# EAGLE board SparkFun_Micro_Bit_Moto_Bit-Panel (EAGLE 9.3.2), part 1 of 3
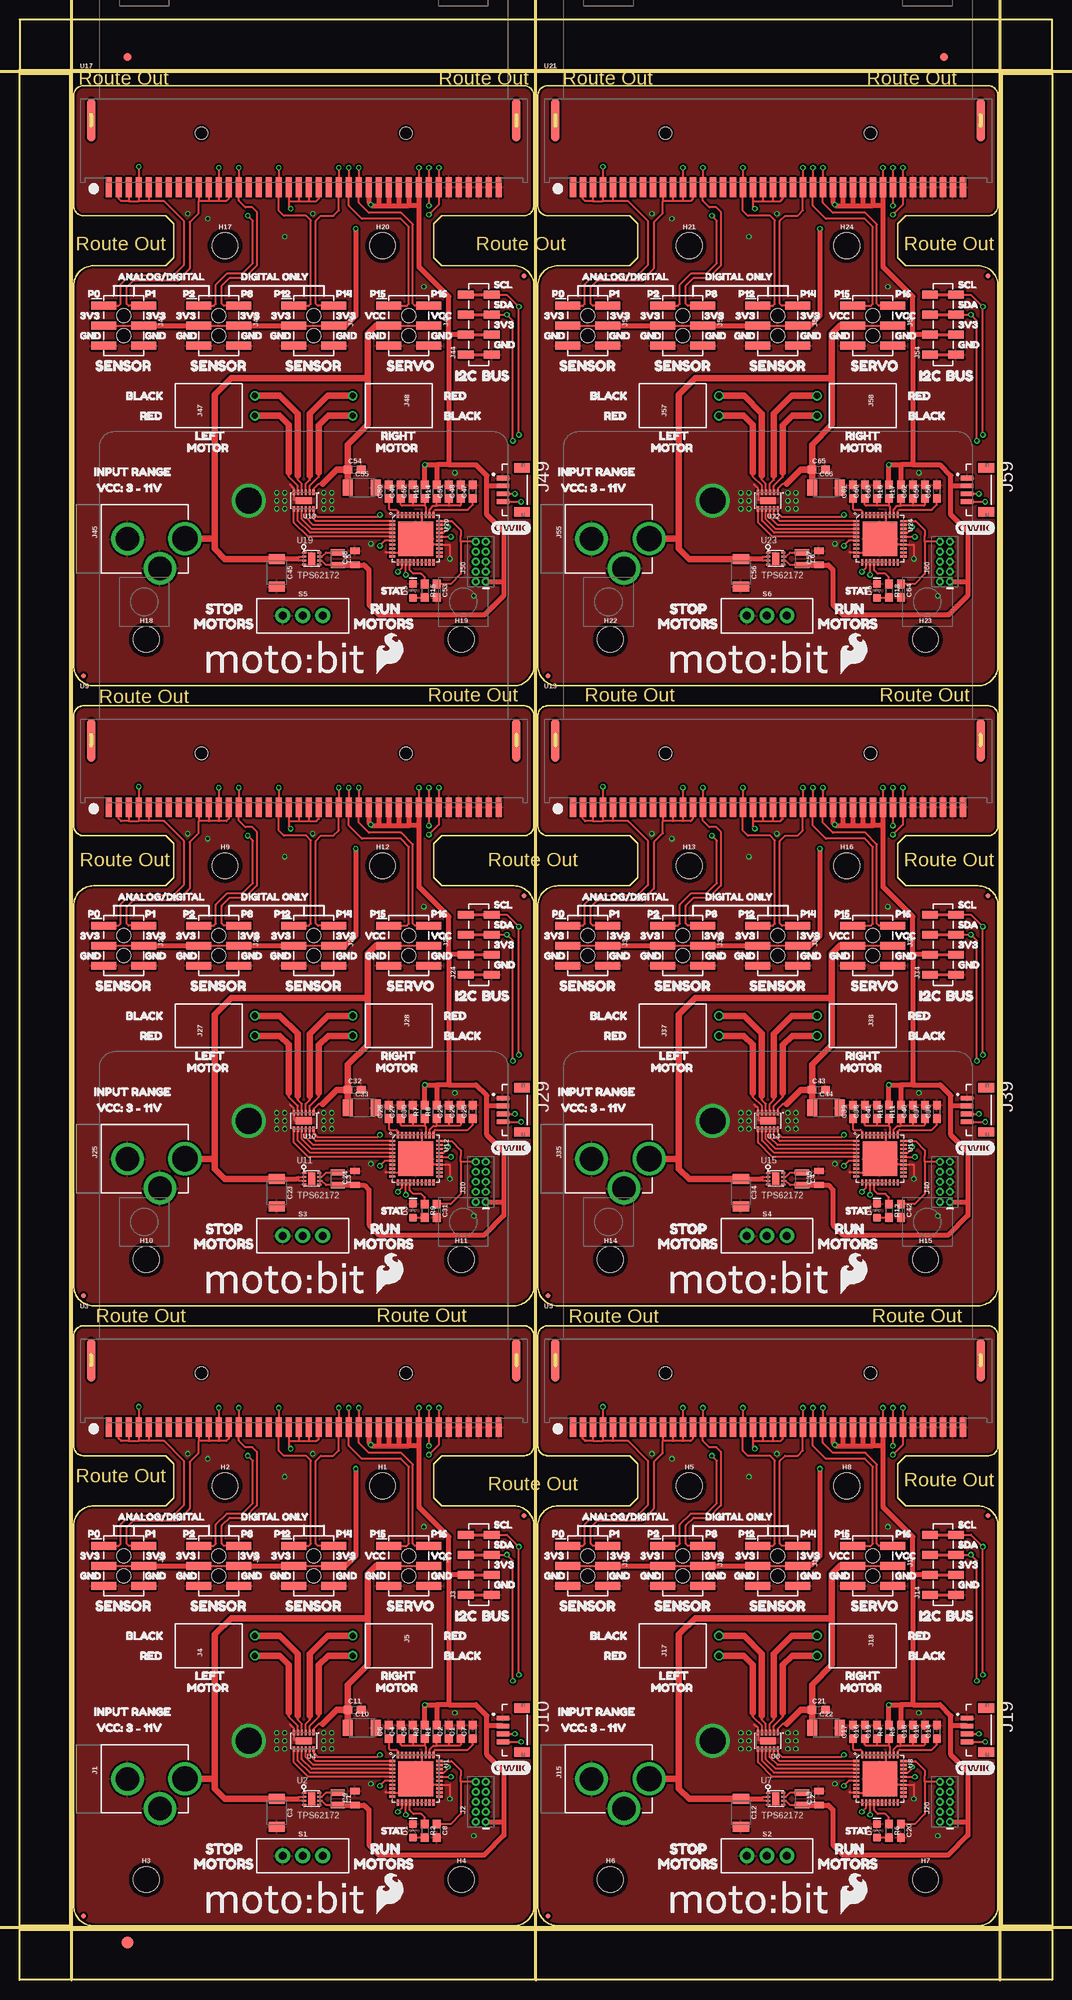
[diagram p0: board, top side]
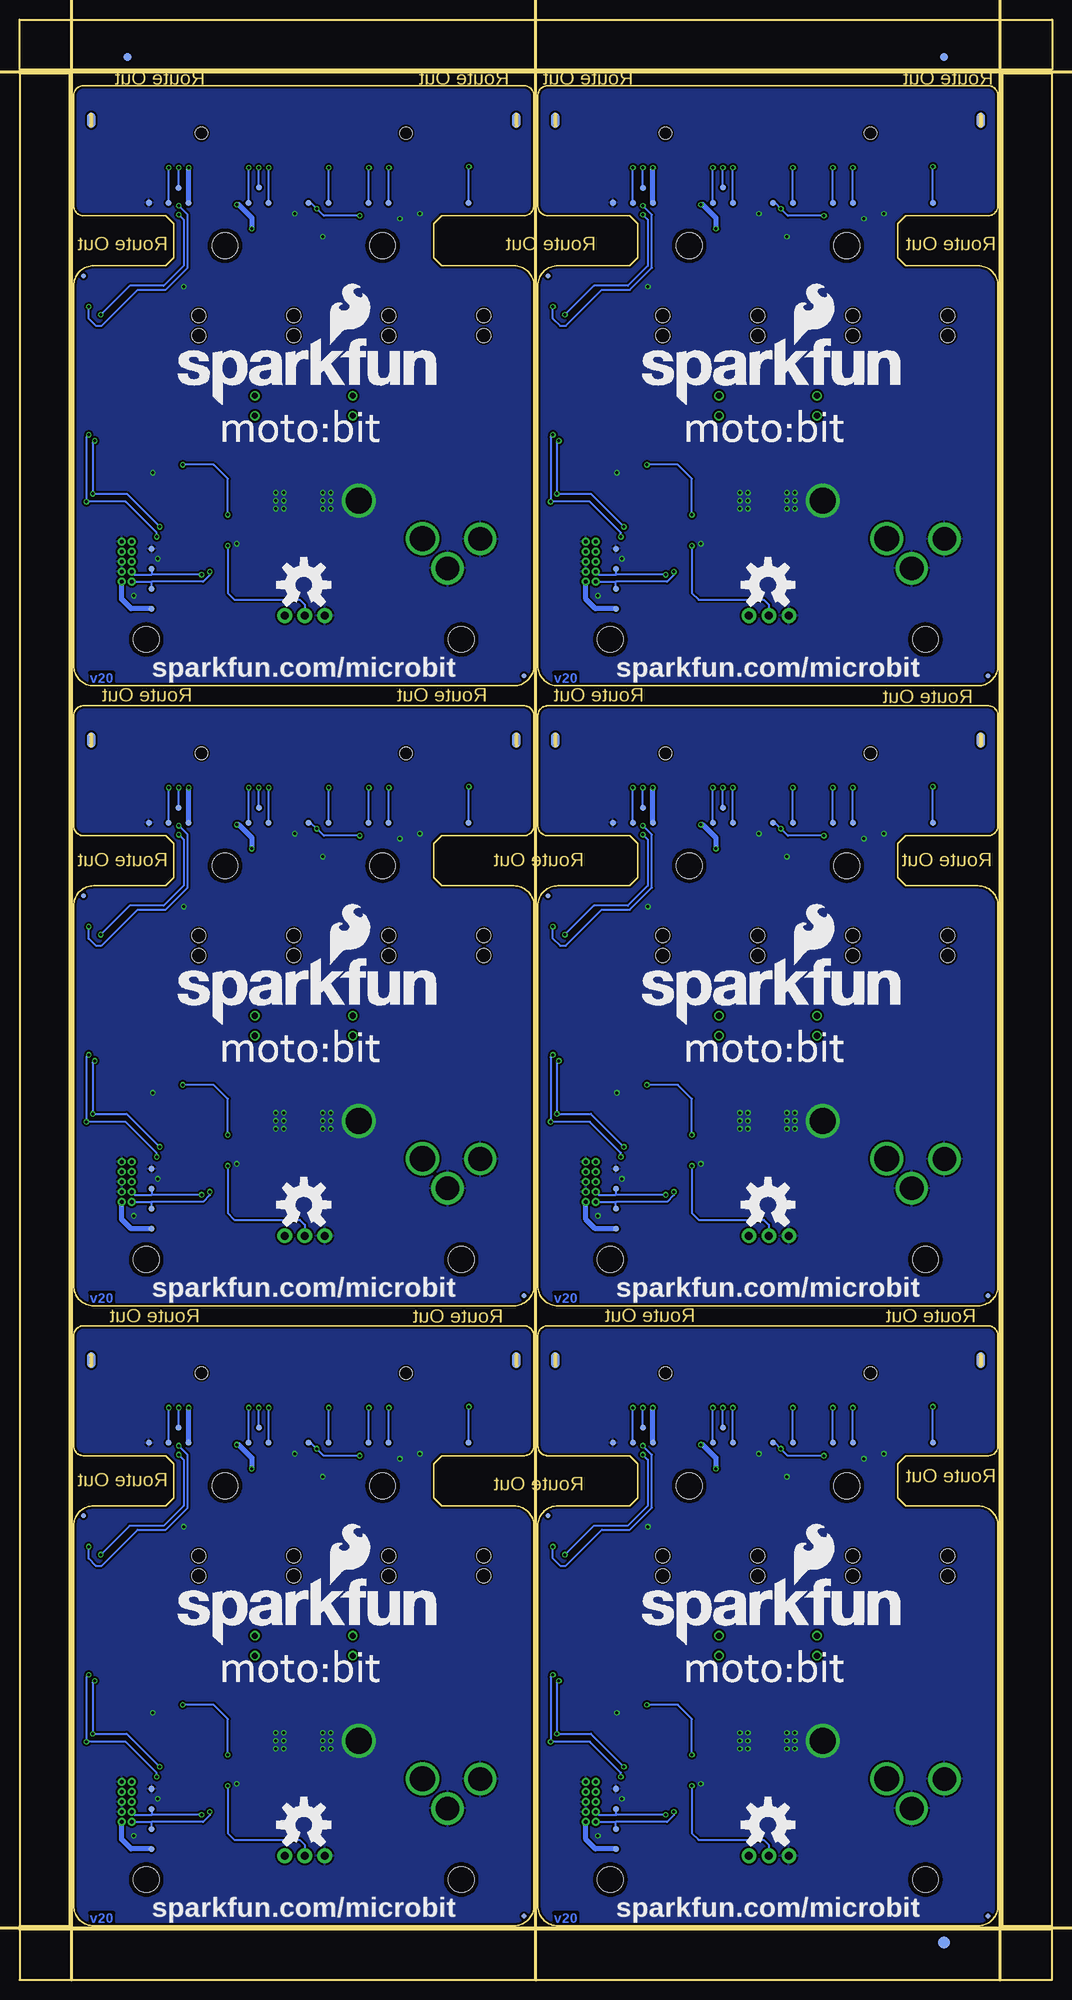
[diagram p1: board, bottom side, seen from below]

Size 131.06 x 248.92 mm. Coordinates in mm from the lower left corner, seen from the top.
Outline: 0,6.35 131.06,6.35 131.06,0 0,0 0,6.35
Outline: 124.71,242.06 131.06,242.06 131.06,6.86 124.71,6.86 124.71,242.06
Outline: 131.06,248.92 0,248.92 0,242.57 131.06,242.57 131.06,248.92
Outline: 0,242.06 6.35,242.06 6.35,6.86 0,6.86 0,242.06
Outline: 9.4,6.86 62.74,6.86 arc90 65.28,9.4 65.28,57.66 arc90 62.74,60.2 53.59,60.2 52.58,61.21 52.58,65.53 53.59,66.55 64.01,66.55 arc90 65.28,67.82 65.28,81.79 arc90 64.01,83.06 8.13,83.06 arc90 6.86,81.79 6.86,67.82 arc90 8.13,66.55 18.54,66.55 19.56,65.53 19.56,61.21 18.54,60.2 9.4,60.2 arc90 6.86,57.66 6.86,9.4 arc90 9.4,6.86
Outline: 68.33,6.86 121.67,6.86 arc90 124.21,9.4 124.21,57.66 arc90 121.67,60.2 112.52,60.2 111.51,61.21 111.51,65.53 112.52,66.55 122.94,66.55 arc90 124.21,67.82 124.21,81.79 arc90 122.94,83.06 67.06,83.06 arc90 65.79,81.79 65.79,67.82 arc90 67.06,66.55 77.47,66.55 78.49,65.53 78.49,61.21 77.47,60.2 68.33,60.2 arc90 65.79,57.66 65.79,9.4 arc90 68.33,6.86
Outline: 9.4,85.6 62.74,85.6 arc90 65.28,88.14 65.28,136.4 arc90 62.74,138.94 53.59,138.94 52.58,139.95 52.58,144.27 53.59,145.29 64.01,145.29 arc90 65.28,146.56 65.28,160.53 arc90 64.01,161.8 8.13,161.8 arc90 6.86,160.53 6.86,146.56 arc90 8.13,145.29 18.54,145.29 19.56,144.27 19.56,139.95 18.54,138.94 9.4,138.94 arc90 6.86,136.4 6.86,88.14 arc90 9.4,85.6
Outline: 68.33,85.6 121.67,85.6 arc90 124.21,88.14 124.21,136.4 arc90 121.67,138.94 112.52,138.94 111.51,139.95 111.51,144.27 112.52,145.29 122.94,145.29 arc90 124.21,146.56 124.21,160.53 arc90 122.94,161.8 67.06,161.8 arc90 65.79,160.53 65.79,146.56 arc90 67.06,145.29 77.47,145.29 78.49,144.27 78.49,139.95 77.47,138.94 68.33,138.94 arc90 65.79,136.4 65.79,88.14 arc90 68.33,85.6
Outline: 9.4,164.34 62.74,164.34 arc90 65.28,166.88 65.28,215.14 arc90 62.74,217.68 53.59,217.68 52.58,218.69 52.58,223.01 53.59,224.03 64.01,224.03 arc90 65.28,225.3 65.28,239.27 arc90 64.01,240.54 8.13,240.54 arc90 6.86,239.27 6.86,225.3 arc90 8.13,224.03 18.54,224.03 19.56,223.01 19.56,218.69 18.54,217.68 9.4,217.68 arc90 6.86,215.14 6.86,166.88 arc90 9.4,164.34
Outline: 68.33,164.34 121.67,164.34 arc90 124.21,166.88 124.21,215.14 arc90 121.67,217.68 112.52,217.68 111.51,218.69 111.51,223.01 112.52,224.03 122.94,224.03 arc90 124.21,225.3 124.21,239.27 arc90 122.94,240.54 67.06,240.54 arc90 65.79,239.27 65.79,225.3 arc90 67.06,224.03 77.47,224.03 78.49,223.01 78.49,218.69 77.47,217.68 68.33,217.68 arc90 65.79,215.14 65.79,166.88 arc90 68.33,164.34
Copper layers (1*16): Top 0.035mm / dielectric 1.5mm / Bottom 0.035mm
Design rules "SparkFun-2-layer-PCBWay-LIMIT": minimum track width 6mil, minimum drill 0.3mm, track to track 6mil, track to pad 6mil, pad to pad 6mil, via to via 6mil, smd to smd 6mil, copper to edge 6mil, drill to drill 6mil, minimum pad ring 6mil, minimum via ring 6mil, stop-mask expansion 4mil, vias tented up to drill 25mil, thermal gap 10mil
Milling: 5 lines

## Footprints (pad centres in the part's own frame; a part is rotated, then mirrored left to right if it is on the bottom)
0603 = smd 1.1 x 1: 1 -0.85,0; 2 0.85,0
1210 = smd 1.27 x 2.06: 1 -1.755,0; 2 1.755,0
0805 = smd 0.8 x 1.2: 1 -0.9,0; 2 0.9,0
LED-0603 = smd 1 x 1: A -0.877,0; C 0.877,0
FIDUCIAL-1X2 = smd 1 x 1: 1 0,0
FIDUCIAL-1.5X3 = smd 1.5 x 1.5: 1 0,0
FIDUCIAL-MICRO = smd 0.635 x 0.635: 1 0,0
STAND-OFF = hole 3.302: 0,0
POWER_JACK_PTH_LOCK = drill 2.997 pad 4.115: GND 0.025,6.557; GNDBREAK 3.762,10.7 | drill 3.2 pad 4.115: PWR 0,13.878
2X5-PTH-1.27MM-NO_SILK = drill 0.508 pad 1: 1 -2.54,-0.635; 2 -2.54,0.635; 3 -1.27,-0.635; 4 -1.27,0.635; 5 0,-0.635; 6 0,0.635; 7 1.27,-0.635; 8 1.27,0.635; 9 2.54,-0.635; 10 2.54,0.635
1X04_SMD_VERTICAL_COMBO = smd 1 x 2: 1 0,-1.65; 1-2 0,1.65; 2 2.54,1.65; 2-2 2.54,-1.65; 3 5.08,-1.65; 3-2 5.08,1.65; 4 7.62,1.65; 4-2 7.62,-1.65
1X02_RA_PTH_FEMALE = drill 0.8: 1 1.27,-5.85; 2 -1.27,-5.85
2X3_SMT_POSTS = smd 1 x 3.17: 1 -2.54,-2.54; 2 -2.54,2.54; 3 0,-2.54; 4 0,2.54; 5 2.54,-2.54; 6 2.54,2.54 | hole 1.8: -1.27,0; 1.27,0
JST04_1MM_VERT = smd 0.6 x 1.55: 1 0.3,0.775; 2 1.3,0.775; 3 2.3,0.775; 4 3.3,0.775 | smd 1.2 x 2: NC1 -1,3.2; NC2 4.6,3.2
0805-WIDE = smd 0.8 x 1.8: 1 -0.8,0; 2 0.8,0
SWITCH_SPDT_PTH_11.6X4.0MM = drill 1.016 pad 1.88: 1 0,2.54; 2 0,0; 3 0,-2.54
PAD.03X.03 = smd 0.762 x 0.762: P$1 0,0
QFN-40 = smd 0.285 x 0.8: 1 -2.25,-3; 2 -1.75,-3; 3 -1.25,-3; 4 -0.75,-3; 5 -0.25,-3; 6 0.25,-3; 7 0.75,-3; 8 1.25,-3; 9 1.75,-3; 10 2.25,-3; 21 2.25,3; 22 1.75,3; 23 1.25,3; 24 0.75,3; 25 0.25,3; 26 -0.25,3; 27 -0.75,3; 28 -1.25,3; 29 -1.75,3; 30 -2.25,3 | smd 0.8 x 0.285: 11 3,-2.25; 12 3,-1.75; 13 3,-1.25; 14 3,-0.75; 15 3,-0.25; 16 3,0.25; 17 3,0.75; 18 3,1.25; 19 3,1.75; 20 3,2.25; 31 -3,2.25; 32 -3,1.75; 33 -3,1.25; 34 -3,0.75; 35 -3,0.25; 36 -3,-0.25; 37 -3,-0.75; 38 -3,-1.25; 39 -3,-1.75; 40 -3,-2.25 | smd 4.4 x 4.4: EP 0,0
WSON-8-PAD = smd 0.25 x 0.5: 1 -0.75,-0.95; 2 -0.25,-0.95; 3 0.25,-0.95; 4 0.75,-0.95; 5 0.75,0.95; 6 0.25,0.95; 7 -0.25,0.95; 8 -0.75,0.95 | smd 1.6 x 0.9: PAD 0,0
MICRO:BIT-RA_SMD = smd 0.8 x 2.5: P$1 -24.765,-6.15; P$2 -23.495,-6.15; P$3 -22.225,-6.15; P$4 -20.955,-6.15; P$5 -19.685,-6.15; P$6 -18.415,-6.15; P$7 -17.145,-6.15; P$8 -15.875,-6.15; P$9 -14.605,-6.15; P$10 -13.335,-6.15; P$11 -12.065,-6.15; P$12 -10.795,-6.15; P$13 -9.525,-6.15; P$14 -8.255,-6.15; P$15 -6.985,-6.15; P$16 -5.715,-6.15; P$17 -4.445,-6.15; P$18 -3.175,-6.15; P$19 -1.905,-6.15; P$20 -0.635,-6.15; P$21 0.635,-6.15; P$22 1.905,-6.15; P$23 3.175,-6.15; P$24 4.445,-6.15; P$25 5.715,-6.15; P$26 6.985,-6.15; P$27 8.255,-6.15; P$28 9.525,-6.15; P$29 10.795,-6.15; P$30 12.065,-6.15; P$31 13.335,-6.15; P$32 14.605,-6.15; P$33 15.875,-6.15; P$34 17.145,-6.15; P$35 18.415,-6.15; P$36 19.685,-6.15; P$37 20.955,-6.15; P$38 22.225,-6.15; P$39 23.495,-6.15; P$40 24.765,-6.15 | smd 1.1 x 5.5: P$42 -27,2.36; P$43 27,2.36 | smd 1.1 x 2 bottom: P$44 -27,2.36; P$45 27,2.36 | hole 1.6: 13,0.7; -13,0.7
WSON-12 = smd 0.3 x 0.7: 1 -1.25,-1.05; 2 -0.75,-1.05; 3 -0.25,-1.05; 4 0.25,-1.05; 5 0.75,-1.05; 6 1.25,-1.05; 7 1.25,1.05; 8 0.75,1.05; 9 0.25,1.05; 10 -0.25,1.05; 11 -0.75,1.05; 12 -1.25,1.05 | smd 2 x 0.9: PAD 0,0

## Placement (x,y rotation side)
C1  1.0uF  [0603]  56.01,31.5 90 top
C2  0.1uF  [0603]  54.48,31.5 90 top
C3  10uF  [1210]  32.64,21.21 270 top
C4  1.0uF  [0603]  48.39,31.5 90 top
C5  0.1uF  [0603]  49.91,31.5 90 top
C6  0.1uF  [0603]  46.86,31.5 90 top
C7  1.0uF  [0603]  57.53,31.5 90 top
C8  0.1uF  [0603]  52.96,18.92 270 top
C9  22uF  [0805]  42.54,23.09 90 top
C10  10uF  [1210]  43.43,32 0 top
C11  0.1uF  [0603]  42.52,34.29 0 top
C12  10uF  [1210]  91.57,21.21 270 top
C13  22uF  [0805]  101.47,23.09 90 top
C14  1.0uF  [0603]  116.46,31.5 90 top
C15  1.0uF  [0603]  114.94,31.5 90 top
C16  1.0uF  [0603]  107.31,31.5 90 top
C17  0.1uF  [0603]  105.79,31.5 90 top
C18  0.1uF  [0603]  113.41,31.5 90 top
C19  0.1uF  [0603]  108.84,31.5 90 top
C20  0.1uF  [0603]  111.89,18.92 270 top
C21  0.1uF  [0603]  101.45,34.29 0 top
C22  10uF  [1210]  102.36,32 0 top
C23  10uF  [1210]  32.64,99.95 270 top
C24  22uF  [0805]  42.54,101.83 90 top
C25  1.0uF  [0603]  57.53,110.24 90 top
C26  1.0uF  [0603]  56.01,110.24 90 top
C27  1.0uF  [0603]  48.39,110.24 90 top
C28  0.1uF  [0603]  46.86,110.24 90 top
C29  0.1uF  [0603]  54.48,110.24 90 top
C30  0.1uF  [0603]  49.91,110.24 90 top
C31  0.1uF  [0603]  52.96,97.66 270 top
C32  0.1uF  [0603]  42.52,113.03 0 top
C33  10uF  [1210]  43.43,110.74 0 top
C34  10uF  [1210]  91.57,99.95 270 top
C35  22uF  [0805]  101.47,101.83 90 top
C36  1.0uF  [0603]  116.46,110.24 90 top
C37  1.0uF  [0603]  114.94,110.24 90 top
C38  1.0uF  [0603]  107.31,110.24 90 top
C39  0.1uF  [0603]  105.79,110.24 90 top
C40  0.1uF  [0603]  113.41,110.24 90 top
C41  0.1uF  [0603]  108.84,110.24 90 top
C42  0.1uF  [0603]  111.89,97.66 270 top
C43  0.1uF  [0603]  101.45,113.03 0 top
C44  10uF  [1210]  102.36,110.74 0 top
C45  10uF  [1210]  32.64,178.69 270 top
C46  22uF  [0805]  42.54,180.57 90 top
C47  1.0uF  [0603]  57.53,188.98 90 top
C48  1.0uF  [0603]  56.01,188.98 90 top
C49  1.0uF  [0603]  48.39,188.98 90 top
C50  0.1uF  [0603]  46.86,188.98 90 top
C51  0.1uF  [0603]  54.48,188.98 90 top
C52  0.1uF  [0603]  49.91,188.98 90 top
C53  0.1uF  [0603]  52.96,176.4 270 top
C54  0.1uF  [0603]  42.52,191.77 0 top
C55  10uF  [1210]  43.43,189.48 0 top
C56  10uF  [1210]  91.57,178.69 270 top
C57  22uF  [0805]  101.47,180.57 90 top
C58  1.0uF  [0603]  116.46,188.98 90 top
C59  1.0uF  [0603]  114.94,188.98 90 top
C60  1.0uF  [0603]  107.31,188.98 90 top
C61  0.1uF  [0603]  105.79,188.98 90 top
C62  0.1uF  [0603]  113.41,188.98 90 top
C63  0.1uF  [0603]  108.84,188.98 90 top
C64  0.1uF  [0603]  111.89,176.4 270 top
C65  0.1uF  [0603]  101.45,191.77 0 top
C66  10uF  [1210]  102.36,189.48 0 top
D1  RED  [LED-0603]  49.91,18.92 90 top
D2  RED  [LED-0603]  108.84,18.92 90 top
D3  RED  [LED-0603]  49.91,97.66 90 top
D4  RED  [LED-0603]  108.84,97.66 90 top
D5  RED  [LED-0603]  49.91,176.4 90 top
D6  RED  [LED-0603]  108.84,176.4 90 top
E$1  [FIDUCIAL-1X2]  117.35,244.16 0 bottom
E$2  [FIDUCIAL-1X2]  117.35,244.16 0 top
E$3  [FIDUCIAL-1X2]  13.72,244.16 0 bottom
E$4  [FIDUCIAL-1X2]  13.72,244.16 0 top
E$5  [FIDUCIAL-1.5X3]  13.72,4.76 0 top
E$6  [FIDUCIAL-1.5X3]  13.72,4.76 0 bottom
FD1  FIDUCIALUFIDUCIAL  [FIDUCIAL-MICRO]  8.13,8.13 0 top
FD2  FIDUCIALUFIDUCIAL  [FIDUCIAL-MICRO]  64.01,58.93 0 top
FD3  FIDUCIALUFIDUCIAL  [FIDUCIAL-MICRO]  8.13,8.13 0 bottom
FD4  FIDUCIALUFIDUCIAL  [FIDUCIAL-MICRO]  64.01,58.93 0 bottom
FD5  FIDUCIALUFIDUCIAL  [FIDUCIAL-MICRO]  67.06,8.13 0 top
FD6  FIDUCIALUFIDUCIAL  [FIDUCIAL-MICRO]  122.94,58.93 0 top
FD7  FIDUCIALUFIDUCIAL  [FIDUCIAL-MICRO]  67.06,8.13 0 bottom
FD8  FIDUCIALUFIDUCIAL  [FIDUCIAL-MICRO]  122.94,58.93 0 bottom
FD9  FIDUCIALUFIDUCIAL  [FIDUCIAL-MICRO]  8.13,86.87 0 top
FD10  FIDUCIALUFIDUCIAL  [FIDUCIAL-MICRO]  64.01,137.67 0 top
FD11  FIDUCIALUFIDUCIAL  [FIDUCIAL-MICRO]  8.13,86.87 0 bottom
FD12  FIDUCIALUFIDUCIAL  [FIDUCIAL-MICRO]  64.01,137.67 0 bottom
FD13  FIDUCIALUFIDUCIAL  [FIDUCIAL-MICRO]  67.06,86.87 0 top
FD14  FIDUCIALUFIDUCIAL  [FIDUCIAL-MICRO]  122.94,137.67 0 top
FD15  FIDUCIALUFIDUCIAL  [FIDUCIAL-MICRO]  67.06,86.87 0 bottom
FD16  FIDUCIALUFIDUCIAL  [FIDUCIAL-MICRO]  122.94,137.67 0 bottom
FD17  FIDUCIALUFIDUCIAL  [FIDUCIAL-MICRO]  8.13,165.61 0 top
FD18  FIDUCIALUFIDUCIAL  [FIDUCIAL-MICRO]  64.01,216.41 0 top
FD19  FIDUCIALUFIDUCIAL  [FIDUCIAL-MICRO]  8.13,165.61 0 bottom
FD20  FIDUCIALUFIDUCIAL  [FIDUCIAL-MICRO]  64.01,216.41 0 bottom
FD21  FIDUCIALUFIDUCIAL  [FIDUCIAL-MICRO]  67.06,165.61 0 top
FD22  FIDUCIALUFIDUCIAL  [FIDUCIAL-MICRO]  122.94,216.41 0 top
FD23  FIDUCIALUFIDUCIAL  [FIDUCIAL-MICRO]  67.06,165.61 0 bottom
FD24  FIDUCIALUFIDUCIAL  [FIDUCIAL-MICRO]  122.94,216.41 0 bottom
H1  STAND-OFF  [STAND-OFF]  46.07,62.74 0 top
H2  STAND-OFF  [STAND-OFF]  26.07,62.74 0 top
H3  STAND-OFF  [STAND-OFF]  16.07,12.74 0 top
H4  STAND-OFF  [STAND-OFF]  56.07,12.74 0 top
H5  STAND-OFF  [STAND-OFF]  85,62.74 0 top
H6  STAND-OFF  [STAND-OFF]  75,12.74 0 top
H7  STAND-OFF  [STAND-OFF]  115,12.74 0 top
H8  STAND-OFF  [STAND-OFF]  105,62.74 0 top
H9  STAND-OFF  [STAND-OFF]  26.07,141.48 0 top
H10  STAND-OFF  [STAND-OFF]  16.07,91.48 0 top
H11  STAND-OFF  [STAND-OFF]  56.07,91.48 0 top
H12  STAND-OFF  [STAND-OFF]  46.07,141.48 0 top
H13  STAND-OFF  [STAND-OFF]  85,141.48 0 top
H14  STAND-OFF  [STAND-OFF]  75,91.48 0 top
H15  STAND-OFF  [STAND-OFF]  115,91.48 0 top
H16  STAND-OFF  [STAND-OFF]  105,141.48 0 top
H17  STAND-OFF  [STAND-OFF]  26.07,220.22 0 top
H18  STAND-OFF  [STAND-OFF]  16.07,170.22 0 top
H19  STAND-OFF  [STAND-OFF]  56.07,170.22 0 top
H20  STAND-OFF  [STAND-OFF]  46.07,220.22 0 top
H21  STAND-OFF  [STAND-OFF]  85,220.22 0 top
H22  STAND-OFF  [STAND-OFF]  75,170.22 0 top
H23  STAND-OFF  [STAND-OFF]  115,170.22 0 top
H24  STAND-OFF  [STAND-OFF]  105,220.22 0 top
J1  POWER_JACKPTH_LOCK  [POWER_JACK_PTH_LOCK]  7.11,25.53 270 top
J2  CORTEX_JTAG_DEBUG  [2X5-PTH-1.27MM-NO_SILK]  58.55,22.61 90 top
J3  [1X04_SMD_VERTICAL_COMBO]  58.29,48.89 90 top
J4  [1X02_RA_PTH_FEMALE]  24,42.42 90 top
J5  [1X02_RA_PTH_FEMALE]  48.13,42.42 270 top
J6  [2X3_SMT_POSTS]  13.21,52.58 270 top
J7  [2X3_SMT_POSTS]  25.27,52.58 270 top
J8  [2X3_SMT_POSTS]  37.34,52.58 270 top
J9  [2X3_SMT_POSTS]  49.4,52.58 270 top
J10  Qwiic  [JST04_1MM_VERT]  60.58,33.53 270 top
J11  [2X3_SMT_POSTS]  72.14,52.58 270 top
J12  [2X3_SMT_POSTS]  84.2,52.58 270 top
J13  [2X3_SMT_POSTS]  96.27,52.58 270 top
J14  [1X04_SMD_VERTICAL_COMBO]  117.22,48.89 90 top
J15  POWER_JACKPTH_LOCK  [POWER_JACK_PTH_LOCK]  66.04,25.53 270 top
J16  [2X3_SMT_POSTS]  108.33,52.58 270 top
J17  [1X02_RA_PTH_FEMALE]  82.93,42.42 90 top
J18  [1X02_RA_PTH_FEMALE]  107.06,42.42 270 top
J19  Qwiic  [JST04_1MM_VERT]  119.51,33.53 270 top
J20  CORTEX_JTAG_DEBUG  [2X5-PTH-1.27MM-NO_SILK]  117.48,22.61 90 top
J21  [2X3_SMT_POSTS]  13.21,131.32 270 top
J22  [2X3_SMT_POSTS]  25.27,131.32 270 top
J23  [2X3_SMT_POSTS]  37.34,131.32 270 top
J24  [1X04_SMD_VERTICAL_COMBO]  58.29,127.63 90 top
J25  POWER_JACKPTH_LOCK  [POWER_JACK_PTH_LOCK]  7.11,104.27 270 top
J26  [2X3_SMT_POSTS]  49.4,131.32 270 top
J27  [1X02_RA_PTH_FEMALE]  24,121.16 90 top
J28  [1X02_RA_PTH_FEMALE]  48.13,121.16 270 top
J29  Qwiic  [JST04_1MM_VERT]  60.58,112.27 270 top
J30  CORTEX_JTAG_DEBUG  [2X5-PTH-1.27MM-NO_SILK]  58.55,101.35 90 top
J31  [2X3_SMT_POSTS]  72.14,131.32 270 top
J32  [2X3_SMT_POSTS]  84.2,131.32 270 top
J33  [2X3_SMT_POSTS]  96.27,131.32 270 top
J34  [1X04_SMD_VERTICAL_COMBO]  117.22,127.63 90 top
J35  POWER_JACKPTH_LOCK  [POWER_JACK_PTH_LOCK]  66.04,104.27 270 top
J36  [2X3_SMT_POSTS]  108.33,131.32 270 top
J37  [1X02_RA_PTH_FEMALE]  82.93,121.16 90 top
J38  [1X02_RA_PTH_FEMALE]  107.06,121.16 270 top
J39  Qwiic  [JST04_1MM_VERT]  119.51,112.27 270 top
J40  CORTEX_JTAG_DEBUG  [2X5-PTH-1.27MM-NO_SILK]  117.48,101.35 90 top
J41  [2X3_SMT_POSTS]  13.21,210.06 270 top
J42  [2X3_SMT_POSTS]  25.27,210.06 270 top
J43  [2X3_SMT_POSTS]  37.34,210.06 270 top
J44  [1X04_SMD_VERTICAL_COMBO]  58.29,206.38 90 top
J45  POWER_JACKPTH_LOCK  [POWER_JACK_PTH_LOCK]  7.11,183.01 270 top
J46  [2X3_SMT_POSTS]  49.4,210.06 270 top
J47  [1X02_RA_PTH_FEMALE]  24,199.9 90 top
J48  [1X02_RA_PTH_FEMALE]  48.13,199.9 270 top
J49  Qwiic  [JST04_1MM_VERT]  60.58,191.01 270 top
J50  CORTEX_JTAG_DEBUG  [2X5-PTH-1.27MM-NO_SILK]  58.55,180.09 90 top
J51  [2X3_SMT_POSTS]  72.14,210.06 270 top
J52  [2X3_SMT_POSTS]  84.2,210.06 270 top
J53  [2X3_SMT_POSTS]  96.27,210.06 270 top
J54  [1X04_SMD_VERTICAL_COMBO]  117.22,206.38 90 top
J55  POWER_JACKPTH_LOCK  [POWER_JACK_PTH_LOCK]  66.04,183.01 270 top
J56  [2X3_SMT_POSTS]  108.33,210.06 270 top
J57  [1X02_RA_PTH_FEMALE]  82.93,199.9 90 top
J58  [1X02_RA_PTH_FEMALE]  107.06,199.9 270 top
J59  Qwiic  [JST04_1MM_VERT]  119.51,191.01 270 top
J60  CORTEX_JTAG_DEBUG  [2X5-PTH-1.27MM-NO_SILK]  117.48,180.09 90 top
L1  2.2μH  [0805-WIDE]  40.39,22.99 270 top
L2  2.2μH  [0805-WIDE]  99.31,22.99 270 top
L3  2.2μH  [0805-WIDE]  40.39,101.73 270 top
L4  2.2μH  [0805-WIDE]  99.31,101.73 270 top
L5  2.2μH  [0805-WIDE]  40.39,180.47 270 top
L6  2.2μH  [0805-WIDE]  99.31,180.47 270 top
LOGO1  SFE_LOGO_NAME_FLAME.3_INCH  [SFE_LOGO_NAME_FLAME_.3]  52.58,42.42 0 bottom
LOGO2  OSHW-LOGOL  [OSHW-LOGO-L]  36.07,19.69 0 bottom
LOGO3  QWIIC_LOGO_5MM  [QWIIC_5MM]  62.36,26.92 0 top
LOGO4  SFE_LOGO_NAME_FLAME.3_INCH  [SFE_LOGO_NAME_FLAME_.3]  111.51,42.42 0 bottom
LOGO5  OSHW-LOGOL  [OSHW-LOGO-L]  95,19.69 0 bottom
LOGO6  QWIIC_LOGO_5MM  [QWIIC_5MM]  121.29,26.92 0 top
LOGO7  SFE_LOGO_NAME_FLAME.3_INCH  [SFE_LOGO_NAME_FLAME_.3]  52.58,121.16 0 bottom
LOGO8  OSHW-LOGOL  [OSHW-LOGO-L]  36.07,98.42 0 bottom
LOGO9  QWIIC_LOGO_5MM  [QWIIC_5MM]  62.36,105.66 0 top
LOGO10  SFE_LOGO_NAME_FLAME.3_INCH  [SFE_LOGO_NAME_FLAME_.3]  111.51,121.16 0 bottom
LOGO11  OSHW-LOGOL  [OSHW-LOGO-L]  95,98.42 0 bottom
LOGO12  QWIIC_LOGO_5MM  [QWIIC_5MM]  121.29,105.66 0 top
LOGO13  SFE_LOGO_NAME_FLAME.3_INCH  [SFE_LOGO_NAME_FLAME_.3]  52.58,199.9 0 bottom
LOGO14  OSHW-LOGOL  [OSHW-LOGO-L]  36.07,177.16 0 bottom
LOGO15  QWIIC_LOGO_5MM  [QWIIC_5MM]  62.36,184.4 0 top
LOGO16  SFE_LOGO_NAME_FLAME.3_INCH  [SFE_LOGO_NAME_FLAME_.3]  111.51,199.9 0 bottom
LOGO17  OSHW-LOGOL  [OSHW-LOGO-L]  95,177.16 0 bottom
LOGO18  QWIIC_LOGO_5MM  [QWIIC_5MM]  121.29,184.4 0 top
R1  1  [0603]  52.96,31.5 90 top
R2  470  [0603]  51.43,18.92 270 top
R3  1  [0603]  51.43,31.5 90 top
R4  1  [0603]  110.36,31.5 90 top
R5  1  [0603]  111.89,31.5 90 top
R6  470  [0603]  110.36,18.92 270 top
R7  1  [0603]  51.43,110.24 90 top
R8  1  [0603]  52.96,110.24 90 top
R9  470  [0603]  51.43,97.66 270 top
R10  1  [0603]  110.36,110.24 90 top
R11  1  [0603]  111.89,110.24 90 top
R12  470  [0603]  110.36,97.66 270 top
R13  1  [0603]  51.43,188.98 90 top
R14  1  [0603]  52.96,188.98 90 top
R15  470  [0603]  51.43,176.4 270 top
R16  1  [0603]  110.36,188.98 90 top
R17  1  [0603]  111.89,188.98 90 top
R18  470  [0603]  110.36,176.4 270 top
S1  [SWITCH_SPDT_PTH_11.6X4.0MM]  35.94,15.75 270 top
S2  [SWITCH_SPDT_PTH_11.6X4.0MM]  94.87,15.75 270 top
S3  [SWITCH_SPDT_PTH_11.6X4.0MM]  35.94,94.49 270 top
S4  [SWITCH_SPDT_PTH_11.6X4.0MM]  94.87,94.49 270 top
S5  [SWITCH_SPDT_PTH_11.6X4.0MM]  35.94,173.23 270 top
S6  [SWITCH_SPDT_PTH_11.6X4.0MM]  94.87,173.23 270 top
TP1  [PAD.03X.03]  55.37,16.64 270 bottom
TP2  [PAD.03X.03]  55.37,24.26 270 bottom
TP3  [PAD.03X.03]  55.37,19.18 270 bottom
TP4  [PAD.03X.03]  55.37,21.72 270 bottom
TP5  [PAD.03X.03]  15.13,68.19 0 bottom
TP6  [PAD.03X.03]  25.29,68.19 0 bottom
TP7  [PAD.03X.03]  27.83,68.19 0 bottom
TP8  [PAD.03X.03]  35.45,68.19 0 bottom
TP9  [PAD.03X.03]  32.91,68.19 0 bottom
TP10  [PAD.03X.03]  40.53,68.19 0 bottom
TP11  [PAD.03X.03]  41.78,70.1 0 bottom
TP12  [PAD.03X.03]  43.07,68.19 0 bottom
TP13  [PAD.03X.03]  51.94,70.09 0 bottom
TP14  [PAD.03X.03]  53.23,68.19 0 bottom
TP15  [PAD.03X.03]  50.69,68.19 0 bottom
TP16  [PAD.03X.03]  55.74,68.2 0 bottom
TP17  [PAD.03X.03]  114.3,19.18 270 bottom
TP18  [PAD.03X.03]  114.3,21.72 270 bottom
TP19  [PAD.03X.03]  114.3,16.64 270 bottom
TP20  [PAD.03X.03]  114.3,24.26 270 bottom
TP21  [PAD.03X.03]  74.05,68.19 0 bottom
TP22  [PAD.03X.03]  84.21,68.19 0 bottom
TP23  [PAD.03X.03]  86.75,68.19 0 bottom
TP24  [PAD.03X.03]  94.37,68.19 0 bottom
TP25  [PAD.03X.03]  91.83,68.19 0 bottom
TP26  [PAD.03X.03]  99.45,68.19 0 bottom
TP27  [PAD.03X.03]  100.71,70.1 0 bottom
TP28  [PAD.03X.03]  101.99,68.19 0 bottom
TP29  [PAD.03X.03]  110.87,70.09 0 bottom
TP30  [PAD.03X.03]  112.15,68.19 0 bottom
TP31  [PAD.03X.03]  109.61,68.19 0 bottom
TP32  [PAD.03X.03]  114.67,68.2 0 bottom
TP33  [PAD.03X.03]  55.37,97.92 270 bottom
TP34  [PAD.03X.03]  55.37,100.46 270 bottom
TP35  [PAD.03X.03]  55.37,95.38 270 bottom
TP36  [PAD.03X.03]  55.37,103 270 bottom
TP37  [PAD.03X.03]  15.13,146.93 0 bottom
TP38  [PAD.03X.03]  25.29,146.93 0 bottom
TP39  [PAD.03X.03]  27.83,146.93 0 bottom
TP40  [PAD.03X.03]  35.45,146.93 0 bottom
TP41  [PAD.03X.03]  32.91,146.93 0 bottom
TP42  [PAD.03X.03]  40.53,146.93 0 bottom
TP43  [PAD.03X.03]  41.78,148.84 0 bottom
TP44  [PAD.03X.03]  43.07,146.93 0 bottom
TP45  [PAD.03X.03]  51.94,148.83 0 bottom
TP46  [PAD.03X.03]  53.23,146.93 0 bottom
TP47  [PAD.03X.03]  50.69,146.93 0 bottom
TP48  [PAD.03X.03]  55.74,146.94 0 bottom
TP49  [PAD.03X.03]  114.3,97.92 270 bottom
TP50  [PAD.03X.03]  114.3,100.46 270 bottom
TP51  [PAD.03X.03]  114.3,95.38 270 bottom
TP52  [PAD.03X.03]  114.3,103 270 bottom
TP53  [PAD.03X.03]  74.05,146.93 0 bottom
TP54  [PAD.03X.03]  84.21,146.93 0 bottom
TP55  [PAD.03X.03]  86.75,146.93 0 bottom
TP56  [PAD.03X.03]  94.37,146.93 0 bottom
TP57  [PAD.03X.03]  91.83,146.93 0 bottom
TP58  [PAD.03X.03]  99.45,146.93 0 bottom
TP59  [PAD.03X.03]  100.71,148.84 0 bottom
TP60  [PAD.03X.03]  101.99,146.93 0 bottom
TP61  [PAD.03X.03]  110.87,148.83 0 bottom
TP62  [PAD.03X.03]  112.15,146.93 0 bottom
TP63  [PAD.03X.03]  109.61,146.93 0 bottom
TP64  [PAD.03X.03]  114.67,146.94 0 bottom
TP65  [PAD.03X.03]  55.37,176.66 270 bottom
TP66  [PAD.03X.03]  55.37,179.2 270 bottom
TP67  [PAD.03X.03]  55.37,174.12 270 bottom
TP68  [PAD.03X.03]  55.37,181.74 270 bottom
TP69  [PAD.03X.03]  15.13,225.67 0 bottom
TP70  [PAD.03X.03]  25.29,225.67 0 bottom
TP71  [PAD.03X.03]  27.83,225.67 0 bottom
TP72  [PAD.03X.03]  35.45,225.67 0 bottom
TP73  [PAD.03X.03]  32.91,225.67 0 bottom
TP74  [PAD.03X.03]  40.53,225.67 0 bottom
TP75  [PAD.03X.03]  41.78,227.58 0 bottom
TP76  [PAD.03X.03]  43.07,225.67 0 bottom
TP77  [PAD.03X.03]  51.94,227.57 0 bottom
TP78  [PAD.03X.03]  53.23,225.67 0 bottom
TP79  [PAD.03X.03]  50.69,225.67 0 bottom
TP80  [PAD.03X.03]  55.74,225.68 0 bottom
TP81  [PAD.03X.03]  114.3,176.66 270 bottom
TP82  [PAD.03X.03]  114.3,179.2 270 bottom
TP83  [PAD.03X.03]  114.3,174.12 270 bottom
TP84  [PAD.03X.03]  114.3,181.74 270 bottom
TP85  [PAD.03X.03]  74.05,225.67 0 bottom
TP86  [PAD.03X.03]  84.21,225.67 0 bottom
TP87  [PAD.03X.03]  86.75,225.67 0 bottom
TP88  [PAD.03X.03]  94.37,225.67 0 bottom
TP89  [PAD.03X.03]  91.83,225.67 0 bottom
TP90  [PAD.03X.03]  99.45,225.67 0 bottom
TP91  [PAD.03X.03]  100.71,227.58 0 bottom
TP92  [PAD.03X.03]  101.99,225.67 0 bottom
TP93  [PAD.03X.03]  110.87,227.57 0 bottom
TP94  [PAD.03X.03]  112.15,225.67 0 bottom
TP95  [PAD.03X.03]  109.61,225.67 0 bottom
TP96  [PAD.03X.03]  114.67,225.68 0 bottom
U1  CY8C4245LQI-483  [QFN-40]  50.29,25.53 270 top
U2  TPS62172  [WSON-8-PAD]  37.08,22.99 270 top
U3  micro:bit  [MICRO:BIT-RA_SMD]  36.07,76.33 0 top
U4  DRV8835  [WSON-12]  36.07,30.35 180 top
U5  micro:bit  [MICRO:BIT-RA_SMD]  95,76.33 0 top
U6  DRV8835  [WSON-12]  95,30.35 180 top
U7  TPS62172  [WSON-8-PAD]  96.01,22.99 270 top
U8  CY8C4245LQI-483  [QFN-40]  109.22,25.53 270 top
U9  micro:bit  [MICRO:BIT-RA_SMD]  36.07,155.07 0 top
U10  DRV8835  [WSON-12]  36.07,109.09 180 top
U11  TPS62172  [WSON-8-PAD]  37.08,101.73 270 top
U12  CY8C4245LQI-483  [QFN-40]  50.29,104.27 270 top
U13  micro:bit  [MICRO:BIT-RA_SMD]  95,155.07 0 top
U14  DRV8835  [WSON-12]  95,109.09 180 top
U15  TPS62172  [WSON-8-PAD]  96.01,101.73 270 top
U16  CY8C4245LQI-483  [QFN-40]  109.22,104.27 270 top
U17  micro:bit  [MICRO:BIT-RA_SMD]  36.07,233.81 0 top
U18  DRV8835  [WSON-12]  36.07,187.83 180 top
U19  TPS62172  [WSON-8-PAD]  37.08,180.47 270 top
U20  CY8C4245LQI-483  [QFN-40]  50.29,183.01 270 top
U21  micro:bit  [MICRO:BIT-RA_SMD]  95,233.81 0 top
U22  DRV8835  [WSON-12]  95,187.83 180 top
U23  TPS62172  [WSON-8-PAD]  96.01,180.47 270 top
U24  CY8C4245LQI-483  [QFN-40]  109.22,183.01 270 top
U$1  [SFE_LOGO_FLAME_.2]  103.89,8.13 0 top
U$2  [SFE_LOGO_FLAME_.2]  44.96,8.13 0 top
U$3  [LOGO-MOTOBIT]  23.62,8.13 0 top
U$4  [LOGO-MOTOBIT]  46.48,37.47 0 bottom
U$5  [3V31]  6.86,53.85 0 top
U$6  [GND0]  6.86,51.31 0 top
U$7  [P02]  7.87,56.64 0 top
U$8  [P13]  15.11,56.64 0 top
U$9  [3V31]  15.24,53.85 0 top
U$10  [GND0]  15.11,51.31 0 top
U$11  [P24]  19.94,56.64 0 top
U$12  [3V31]  19.05,53.85 0 top
U$13  [GND0]  19.05,51.31 0 top
U$14  [P85]  27.3,56.64 0 top
U$15  [3V31]  27.18,53.85 0 top
U$16  [GND0]  27.3,51.31 0 top
U$17  [P126]  31.37,56.64 0 top
U$18  [3V31]  31.12,53.85 0 top
U$19  [GND0]  30.99,51.31 0 top
U$20  [P147]  39.37,56.64 0 top
U$21  [3V31]  39.37,53.85 0 top
U$22  [GND0]  39.37,51.31 0 top
U$23  [P158]  43.69,56.64 0 top
U$24  [VCC10]  43.05,53.85 0 top
U$25  [GND0]  43.05,51.31 0 top
U$26  [P169]  51.43,56.64 0 top
U$27  [VCC10]  51.43,53.85 0 top
U$28  [GND0]  51.43,51.31 0 top
U$29  [SCL2]  59.44,57.78 0 top
U$30  [SDA3]  59.44,55.25 0 top
U$31  [3V31]  59.44,52.7 0 top
U$32  [GND0]  59.44,50.17 0 top
U$33  [I2C4]  54.1,46.23 0 top
U$34  [BUS5]  57.53,46.23 0 top
U$35  [SERVO6]  45.47,47.5 0 top
U$36  [SENSOR7]  32.38,47.5 0 top
U$37  [SENSOR7]  20.32,47.5 0 top
U$38  [SENSOR7]  8.25,47.5 0 top
U$39  [ANALOG#DIGITAL0]  11.68,58.8 0 top
U$40  [DIGITAL_ONLY1]  27.3,58.8 0 top
U$41  [BLACK8]  12.57,43.69 0 top
U$42  [RED9]  14.22,41.15 0 top
U$43  [RED9]  52.83,43.69 0 top
U$44  [BLACK8]  52.96,41.15 0 top
U$45  [LEFT10]  21.34,38.61 0 top
U$46  [MOTOR11]  20.32,37.08 0 top
U$47  [RIGHT12]  44.96,38.61 0 top
U$48  [MOTOR11]  44.32,37.08 0 top
U$49  [INPUT_RANGE13]  8.51,34.04 0 top
U$50  [VCC#_3_#_11V14]  8.89,32 0 top
U$51  [STOP15]  22.48,16.64 0 top
U$52  [MOTORS16]  20.95,14.73 0 top
U$53  [RUN17]  43.43,16.64 0 top
U$54  [MOTORS16]  41.27,14.73 0 top
U$55  [STAT18]  45.08,18.92 0 top
U$56  [LOGO-MOTOBIT]  82.55,8.13 0 top
U$57  [LOGO-MOTOBIT]  105.41,37.47 0 bottom
U$58  [3V31]  65.79,53.85 0 top
U$59  [GND0]  65.79,51.31 0 top
U$60  [P02]  66.8,56.64 0 top
U$61  [P13]  74.04,56.64 0 top
U$62  [3V31]  74.17,53.85 0 top
U$63  [GND0]  74.04,51.31 0 top
U$64  [P24]  78.87,56.64 0 top
U$65  [3V31]  77.98,53.85 0 top
U$66  [GND0]  77.98,51.31 0 top
U$67  [P85]  86.23,56.64 0 top
U$68  [3V31]  86.11,53.85 0 top
U$69  [GND0]  86.23,51.31 0 top
U$70  [P126]  90.3,56.64 0 top
U$71  [3V31]  90.04,53.85 0 top
U$72  [GND0]  89.92,51.31 0 top
U$73  [P147]  98.3,56.64 0 top
U$74  [3V31]  98.3,53.85 0 top
U$75  [GND0]  98.3,51.31 0 top
U$76  [P158]  102.62,56.64 0 top
U$77  [VCC10]  101.98,53.85 0 top
U$78  [GND0]  101.98,51.31 0 top
U$79  [P169]  110.36,56.64 0 top
U$80  [VCC10]  110.36,53.85 0 top
U$81  [GND0]  110.36,51.31 0 top
U$82  [SCL2]  118.36,57.78 0 top
U$83  [SDA3]  118.36,55.25 0 top
U$84  [3V31]  118.36,52.7 0 top
U$85  [GND0]  118.36,50.17 0 top
U$86  [I2C4]  113.03,46.23 0 top
U$87  [BUS5]  116.46,46.23 0 top
U$88  [SERVO6]  104.39,47.5 0 top
U$89  [SENSOR7]  91.31,47.5 0 top
U$90  [SENSOR7]  79.25,47.5 0 top
U$91  [SENSOR7]  67.18,47.5 0 top
U$92  [ANALOG#DIGITAL0]  70.61,58.8 0 top
U$93  [DIGITAL_ONLY1]  86.23,58.8 0 top
U$94  [BLACK8]  71.5,43.69 0 top
U$95  [RED9]  73.15,41.15 0 top
U$96  [RED9]  111.76,43.69 0 top
U$97  [BLACK8]  111.89,41.15 0 top
U$98  [LEFT10]  80.26,38.61 0 top
U$99  [MOTOR11]  79.25,37.08 0 top
U$100  [RIGHT12]  103.89,38.61 0 top
U$101  [MOTOR11]  103.25,37.08 0 top
U$102  [INPUT_RANGE13]  67.44,34.04 0 top
U$103  [VCC#_3_#_11V14]  67.82,32 0 top
U$104  [STOP15]  81.41,16.64 0 top
U$105  [MOTORS16]  79.88,14.73 0 top
U$106  [RUN17]  102.36,16.64 0 top
U$107  [MOTORS16]  100.2,14.73 0 top
U$108  [STAT18]  104.01,18.92 0 top
U$109  [SFE_LOGO_FLAME_.2]  44.96,86.87 0 top
U$110  [LOGO-MOTOBIT]  23.62,86.87 0 top
U$111  [LOGO-MOTOBIT]  46.48,116.2 0 bottom
U$112  [3V31]  6.86,132.59 0 top
U$113  [GND0]  6.86,130.05 0 top
U$114  [P02]  7.87,135.38 0 top
U$115  [P13]  15.11,135.38 0 top
U$116  [3V31]  15.24,132.59 0 top
U$117  [GND0]  15.11,130.05 0 top
U$118  [P24]  19.94,135.38 0 top
U$119  [3V31]  19.05,132.59 0 top
U$120  [GND0]  19.05,130.05 0 top
U$121  [P85]  27.3,135.38 0 top
U$122  [3V31]  27.18,132.59 0 top
U$123  [GND0]  27.3,130.05 0 top
U$124  [P126]  31.37,135.38 0 top
U$125  [3V31]  31.12,132.59 0 top
U$126  [GND0]  30.99,130.05 0 top
U$127  [P147]  39.37,135.38 0 top
U$128  [3V31]  39.37,132.59 0 top
U$129  [GND0]  39.37,130.05 0 top
U$130  [P158]  43.69,135.38 0 top
U$131  [VCC10]  43.05,132.59 0 top
U$132  [GND0]  43.05,130.05 0 top
U$133  [P169]  51.43,135.38 0 top
U$134  [VCC10]  51.43,132.59 0 top
U$135  [GND0]  51.43,130.05 0 top
U$136  [SCL2]  59.44,136.53 0 top
U$137  [SDA3]  59.44,133.99 0 top
U$138  [3V31]  59.44,131.44 0 top
U$139  [GND0]  59.44,128.91 0 top
U$140  [I2C4]  54.1,124.97 0 top
U$141  [BUS5]  57.53,124.97 0 top
U$142  [SERVO6]  45.47,126.24 0 top
U$143  [SENSOR7]  32.38,126.24 0 top
U$144  [SENSOR7]  20.32,126.24 0 top
U$145  [SENSOR7]  8.25,126.24 0 top
U$146  [ANALOG#DIGITAL0]  11.68,137.54 0 top
U$147  [DIGITAL_ONLY1]  27.3,137.54 0 top
U$148  [BLACK8]  12.57,122.43 0 top
U$149  [RED9]  14.22,119.89 0 top
U$150  [RED9]  52.83,122.43 0 top
U$151  [BLACK8]  52.96,119.89 0 top
U$152  [LEFT10]  21.34,117.35 0 top
U$153  [MOTOR11]  20.32,115.82 0 top
U$154  [RIGHT12]  44.96,117.35 0 top
U$155  [MOTOR11]  44.32,115.82 0 top
U$156  [INPUT_RANGE13]  8.51,112.78 0 top
U$157  [VCC#_3_#_11V14]  8.89,110.74 0 top
U$158  [STOP15]  22.48,95.38 0 top
U$159  [MOTORS16]  20.95,93.47 0 top
U$160  [RUN17]  43.43,95.38 0 top
U$161  [MOTORS16]  41.27,93.47 0 top
U$162  [STAT18]  45.08,97.66 0 top
U$163  [SFE_LOGO_FLAME_.2]  103.89,86.87 0 top
U$164  [LOGO-MOTOBIT]  82.55,86.87 0 top
U$165  [LOGO-MOTOBIT]  105.41,116.2 0 bottom
U$166  [3V31]  65.79,132.59 0 top
U$167  [GND0]  65.79,130.05 0 top
U$168  [P02]  66.8,135.38 0 top
U$169  [P13]  74.04,135.38 0 top
U$170  [3V31]  74.17,132.59 0 top
U$171  [GND0]  74.04,130.05 0 top
U$172  [P24]  78.87,135.38 0 top
U$173  [3V31]  77.98,132.59 0 top
U$174  [GND0]  77.98,130.05 0 top
U$175  [P85]  86.23,135.38 0 top
U$176  [3V31]  86.11,132.59 0 top
U$177  [GND0]  86.23,130.05 0 top
U$178  [P126]  90.3,135.38 0 top
U$179  [3V31]  90.04,132.59 0 top
U$180  [GND0]  89.92,130.05 0 top
U$181  [P147]  98.3,135.38 0 top
U$182  [3V31]  98.3,132.59 0 top
U$183  [GND0]  98.3,130.05 0 top
U$184  [P158]  102.62,135.38 0 top
U$185  [VCC10]  101.98,132.59 0 top
U$186  [GND0]  101.98,130.05 0 top
U$187  [P169]  110.36,135.38 0 top
U$188  [VCC10]  110.36,132.59 0 top
U$189  [GND0]  110.36,130.05 0 top
U$190  [SCL2]  118.36,136.53 0 top
U$191  [SDA3]  118.36,133.99 0 top
U$192  [3V31]  118.36,131.44 0 top
U$193  [GND0]  118.36,128.91 0 top
U$194  [I2C4]  113.03,124.97 0 top
U$195  [BUS5]  116.46,124.97 0 top
U$196  [SERVO6]  104.39,126.24 0 top
U$197  [SENSOR7]  91.31,126.24 0 top
U$198  [SENSOR7]  79.25,126.24 0 top
U$199  [SENSOR7]  67.18,126.24 0 top
U$200  [ANALOG#DIGITAL0]  70.61,137.54 0 top
U$201  [DIGITAL_ONLY1]  86.23,137.54 0 top
U$202  [BLACK8]  71.5,122.43 0 top
U$203  [RED9]  73.15,119.89 0 top
U$204  [RED9]  111.76,122.43 0 top
U$205  [BLACK8]  111.89,119.89 0 top
U$206  [LEFT10]  80.26,117.35 0 top
U$207  [MOTOR11]  79.25,115.82 0 top
U$208  [RIGHT12]  103.89,117.35 0 top
U$209  [MOTOR11]  103.25,115.82 0 top
U$210  [INPUT_RANGE13]  67.44,112.78 0 top
U$211  [VCC#_3_#_11V14]  67.82,110.74 0 top
U$212  [STOP15]  81.41,95.38 0 top
U$213  [MOTORS16]  79.88,93.47 0 top
U$214  [RUN17]  102.36,95.38 0 top
U$215  [MOTORS16]  100.2,93.47 0 top
U$216  [STAT18]  104.01,97.66 0 top
U$217  [SFE_LOGO_FLAME_.2]  44.96,165.61 0 top
U$218  [LOGO-MOTOBIT]  23.62,165.61 0 top
U$219  [LOGO-MOTOBIT]  46.48,194.94 0 bottom
U$220  [3V31]  6.86,211.33 0 top
U$221  [GND0]  6.86,208.79 0 top
U$222  [P02]  7.87,214.12 0 top
U$223  [P13]  15.11,214.12 0 top
U$224  [3V31]  15.24,211.33 0 top
U$225  [GND0]  15.11,208.79 0 top
U$226  [P24]  19.94,214.12 0 top
U$227  [3V31]  19.05,211.33 0 top
U$228  [GND0]  19.05,208.79 0 top
U$229  [P85]  27.3,214.12 0 top
U$230  [3V31]  27.18,211.33 0 top
U$231  [GND0]  27.3,208.79 0 top
U$232  [P126]  31.37,214.12 0 top
U$233  [3V31]  31.12,211.33 0 top
U$234  [GND0]  30.99,208.79 0 top
U$235  [P147]  39.37,214.12 0 top
U$236  [3V31]  39.37,211.33 0 top
U$237  [GND0]  39.37,208.79 0 top
U$238  [P158]  43.69,214.12 0 top
U$239  [VCC10]  43.05,211.33 0 top
U$240  [GND0]  43.05,208.79 0 top
U$241  [P169]  51.43,214.12 0 top
U$242  [VCC10]  51.43,211.33 0 top
U$243  [GND0]  51.43,208.79 0 top
U$244  [SCL2]  59.44,215.26 0 top
U$245  [SDA3]  59.44,212.72 0 top
U$246  [3V31]  59.44,210.19 0 top
U$247  [GND0]  59.44,207.65 0 top
U$248  [I2C4]  54.1,203.71 0 top
U$249  [BUS5]  57.53,203.71 0 top
U$250  [SERVO6]  45.47,204.98 0 top
U$251  [SENSOR7]  32.38,204.98 0 top
U$252  [SENSOR7]  20.32,204.98 0 top
U$253  [SENSOR7]  8.25,204.98 0 top
U$254  [ANALOG#DIGITAL0]  11.68,216.28 0 top
U$255  [DIGITAL_ONLY1]  27.3,216.28 0 top
U$256  [BLACK8]  12.57,201.17 0 top
U$257  [RED9]  14.22,198.63 0 top
U$258  [RED9]  52.83,201.17 0 top
U$259  [BLACK8]  52.96,198.63 0 top
U$260  [LEFT10]  21.34,196.09 0 top
U$261  [MOTOR11]  20.32,194.56 0 top
U$262  [RIGHT12]  44.96,196.09 0 top
U$263  [MOTOR11]  44.32,194.56 0 top
U$264  [INPUT_RANGE13]  8.51,191.52 0 top
U$265  [VCC#_3_#_11V14]  8.89,189.48 0 top
U$266  [STOP15]  22.48,174.12 0 top
U$267  [MOTORS16]  20.95,172.21 0 top
U$268  [RUN17]  43.43,174.12 0 top
U$269  [MOTORS16]  41.27,172.21 0 top
U$270  [STAT18]  45.08,176.4 0 top
U$271  [SFE_LOGO_FLAME_.2]  103.89,165.61 0 top
U$272  [LOGO-MOTOBIT]  82.55,165.61 0 top
U$273  [LOGO-MOTOBIT]  105.41,194.94 0 bottom
U$274  [3V31]  65.79,211.33 0 top
U$275  [GND0]  65.79,208.79 0 top
U$276  [P02]  66.8,214.12 0 top
U$277  [P13]  74.04,214.12 0 top
U$278  [3V31]  74.17,211.33 0 top
U$279  [GND0]  74.04,208.79 0 top
U$280  [P24]  78.87,214.12 0 top
U$281  [3V31]  77.98,211.33 0 top
U$282  [GND0]  77.98,208.79 0 top
U$283  [P85]  86.23,214.12 0 top
U$284  [3V31]  86.11,211.33 0 top
U$285  [GND0]  86.23,208.79 0 top
U$286  [P126]  90.3,214.12 0 top
U$287  [3V31]  90.04,211.33 0 top
U$288  [GND0]  89.92,208.79 0 top
U$289  [P147]  98.3,214.12 0 top
U$290  [3V31]  98.3,211.33 0 top
U$291  [GND0]  98.3,208.79 0 top
U$292  [P158]  102.62,214.12 0 top
U$293  [VCC10]  101.98,211.33 0 top
U$294  [GND0]  101.98,208.79 0 top
U$295  [P169]  110.36,214.12 0 top
U$296  [VCC10]  110.36,211.33 0 top
U$297  [GND0]  110.36,208.79 0 top
U$298  [SCL2]  118.36,215.26 0 top
U$299  [SDA3]  118.36,212.72 0 top
U$300  [3V31]  118.36,210.19 0 top
U$301  [GND0]  118.36,207.65 0 top
U$302  [I2C4]  113.03,203.71 0 top
U$303  [BUS5]  116.46,203.71 0 top
U$304  [SERVO6]  104.39,204.98 0 top
U$305  [SENSOR7]  91.31,204.98 0 top
U$306  [SENSOR7]  79.25,204.98 0 top
U$307  [SENSOR7]  67.18,204.98 0 top
U$308  [ANALOG#DIGITAL0]  70.61,216.28 0 top
U$309  [DIGITAL_ONLY1]  86.23,216.28 0 top
U$310  [BLACK8]  71.5,201.17 0 top
U$311  [RED9]  73.15,198.63 0 top
U$312  [RED9]  111.76,201.17 0 top
U$313  [BLACK8]  111.89,198.63 0 top
U$314  [LEFT10]  80.26,196.09 0 top
U$315  [MOTOR11]  79.25,194.56 0 top
U$316  [RIGHT12]  103.89,196.09 0 top
U$317  [MOTOR11]  103.25,194.56 0 top
U$318  [INPUT_RANGE13]  67.44,191.52 0 top
U$319  [VCC#_3_#_11V14]  67.82,189.48 0 top
U$320  [STOP15]  81.41,174.12 0 top
U$321  [MOTORS16]  79.88,172.21 0 top
U$322  [RUN17]  102.36,174.12 0 top
U$323  [MOTORS16]  100.2,172.21 0 top
U$324  [STAT18]  104.01,176.4 0 top

## Library data of the parts
C1 C4 C7 C14-C16 C25-C27 C36-C38 C47-C49 C58-C60 = SparkFun-Capacitors; PROD_ID: CAP-00868
C2 C5 C6 C8 C11 C17-C21 C28-C32 C39-C43 C50-C54 C61-C65 = SparkFun-Capacitors; PROD_ID: CAP-00810
C3 C10 C12 C22 C23 C33 C34 C44 C45 C55 C56 C66 = SparkFun-Capacitors; PROD_ID: CAP-09824
C9 C13 C24 C35 C46 C57 = SparkFun-Capacitors; PROD_ID: CAP-08402
D1-D6 = SparkFun-LED; PROD_ID: DIO-00819
E$1-E$4 FD1-FD24 LOGO1-LOGO18 U$1 U$2 U$109 U$163 U$217 U$271 = SparkFun-Aesthetics
E$5 E$6 = SparkFun-Retired
H1-H24 = SparkFun-Hardware
J1 J15 J25 J35 J45 J55 = SparkFun-Connectors; PROD_ID: CONN-08197; SF_ID: PRT-00119
J2 J20 J30 J40 J50 J60 TP1-TP96 = SparkFun-Connectors
J3 J14 J24 J34 J44 J54 = SparkFun-Connectors; PROD_ID: CONN-08511
J4 J5 J17 J18 J27 J28 J37 J38 J47 J48 J57 J58 = SparkFun-Connectors; PROD_ID: CONN-13700
J6-J9 J11-J13 J16 J21-J23 J26 J31-J33 J36 J41-J43 J46 J51-J53 J56 = SparkFun-Connectors; PROD_ID: CONN-11415
J10 J19 J29 J39 J49 J59 = SparkFun-Connectors; PROD_ID: CONN-14483; VALUE: Vertical Qwiic Connector
L1-L6 = SparkFun-Coils; PROD_ID: NDUC-14234
R1 R3-R5 R7 R8 R10 R11 R13 R14 R16 R17 = SparkFun-Resistors; PROD_ID: RES-08269
R2 R6 R9 R12 R15 R18 = SparkFun-Resistors; PROD_ID: RES-07869
S1-S6 = SparkFun-Switches; PROD_ID: SWCH-13151
U1 U8 U12 U16 U20 U24 = SparkFun-IC-Microcontroller; PROD_ID: IC-13292
U2 U7 U11 U15 U19 U23 = SparkFun-IC-Power; PROD_ID: IC-11307
U3 U5 U9 U13 U17 U21 = SparkFun-Connectors; PROD_ID: CONN-14679
U4 U6 U10 U14 U18 U22 = SparkFun-IC-Special-Function; PROD_ID: IC-13342
U$3 U$4 U$56 U$57 U$110 U$111 U$164 U$165 U$218 U$219 U$272 U$273 = Micro_Bit_Parts
U$5-U$28 U$31 U$32 U$58-U$81 U$84 U$85 U$112-U$135 U$138 U$139 U$166-U$189 U$192 U$193 U$220-U$243 U$246 U$247 U$274-U$297 U$300 U$301 = buzzard_labels (17)
U$29 U$30 U$33-U$55 U$82 U$83 U$86-U$108 U$136 U$137 U$140-U$162 U$190 U$191 U$194-U$216 U$244 U$245 U$248-U$270 U$298 U$299 U$302-U$324 = buzzard_labels (18)

## Nets
3.3V: C9.1 J2.1 J3.2 J6.3 J6.4 J7.3 J7.4 J8.3 J8.4 J10.2 L1.2 R1.2 R3.2 TP1.P$1 TP15.P$1 U2.6 U3.P$27 U3.P$28 U3.P$29 U3.P$30 U3.P$31 U3.P$32 U4.12
3.3V1: C13.1 J11.3 J11.4 J12.3 J12.4 J13.3 J13.4 J14.2 J19.2 J20.1 L2.2 R4.2 R5.2 TP19.P$1 TP31.P$1 U5.P$27 U5.P$28 U5.P$29 U5.P$30 U5.P$31 U5.P$32 U6.12 U7.6
3.3V2: C24.1 J21.3 J21.4 J22.3 J22.4 J23.3 J23.4 J24.2 J29.2 J30.1 L3.2 R7.2 R8.2 TP35.P$1 TP47.P$1 U9.P$27 U9.P$28 U9.P$29 U9.P$30 U9.P$31 U9.P$32 U10.12 U11.6
3.3V3: C35.1 J31.3 J31.4 J32.3 J32.4 J33.3 J33.4 J34.2 J39.2 J40.1 L4.2 R10.2 R11.2 TP51.P$1 TP63.P$1 U13.P$27 U13.P$28 U13.P$29 U13.P$30 U13.P$31 U13.P$32 U14.12 U15.6
3.3V4: C46.1 J41.3 J41.4 J42.3 J42.4 J43.3 J43.4 J44.2 J49.2 J50.1 L5.2 R13.2 R14.2 TP67.P$1 TP79.P$1 U17.P$27 U17.P$28 U17.P$29 U17.P$30 U17.P$31 U17.P$32 U18.12 U19.6
3.3V5: C57.1 J51.3 J51.4 J52.3 J52.4 J53.3 J53.4 J54.2 J59.2 J60.1 L6.2 R16.2 R17.2 TP83.P$1 TP95.P$1 U21.P$27 U21.P$28 U21.P$29 U21.P$30 U21.P$31 U21.P$32 U22.12 U23.6
!RESET: C8.1 J2.10 U1.30
!RESET1: C20.1 J20.10 U8.30
!RESET2: C31.1 J30.10 U12.30
!RESET3: C42.1 J40.10 U16.30
!RESET4: C53.1 J50.10 U20.30
!RESET5: C64.1 J60.10 U24.30
ANALOG_0: J6.1 TP5.P$1 U3.P$2 U3.P$3 U3.P$4 U3.P$5
ANALOG_1: J6.2 TP6.P$1 U3.P$10 U3.P$11 U3.P$12 U3.P$13
ANALOG_2: J7.1 TP8.P$1 U3.P$19 U3.P$20 U3.P$21 U3.P$22
ANALOG_3: J12.1 TP24.P$1 U5.P$19 U5.P$20 U5.P$21 U5.P$22
ANALOG_4: J11.2 TP22.P$1 U5.P$10 U5.P$11 U5.P$12 U5.P$13
ANALOG_5: J11.1 TP21.P$1 U5.P$2 U5.P$3 U5.P$4 U5.P$5
ANALOG_6: J22.1 TP40.P$1 U9.P$19 U9.P$20 U9.P$21 U9.P$22
ANALOG_7: J21.2 TP38.P$1 U9.P$10 U9.P$11 U9.P$12 U9.P$13
ANALOG_8: J21.1 TP37.P$1 U9.P$2 U9.P$3 U9.P$4 U9.P$5
ANALOG_9: J32.1 TP56.P$1 U13.P$19 U13.P$20 U13.P$21 U13.P$22
ANALOG_10: J31.2 TP54.P$1 U13.P$10 U13.P$11 U13.P$12 U13.P$13
ANALOG_11: J31.1 TP53.P$1 U13.P$2 U13.P$3 U13.P$4 U13.P$5
ANALOG_12: J42.1 TP72.P$1 U17.P$19 U17.P$20 U17.P$21 U17.P$22
ANALOG_13: J41.2 TP70.P$1 U17.P$10 U17.P$11 U17.P$12 U17.P$13
ANALOG_14: J41.1 TP69.P$1 U17.P$2 U17.P$3 U17.P$4 U17.P$5
ANALOG_15: J52.1 TP88.P$1 U21.P$19 U21.P$20 U21.P$21 U21.P$22
ANALOG_16: J51.2 TP86.P$1 U21.P$10 U21.P$11 U21.P$12 U21.P$13
ANALOG_17: J51.1 TP85.P$1 U21.P$2 U21.P$3 U21.P$4 U21.P$5
AO1: J5.1 U4.2
AO2: J5.2 U4.3
AO3: J18.1 U6.2
AO4: J18.2 U6.3
AO5: J28.1 U10.2
AO6: J28.2 U10.3
AO7: J38.1 U14.2
AO8: J38.2 U14.3
AO9: J48.1 U18.2
AO10: J48.2 U18.3
AO11: J58.1 U22.2
AO12: J58.2 U22.3
BO1: J4.1 U4.4
BO2: J4.2 U4.5
BO3: J17.1 U6.4
BO4: J17.2 U6.5
BO5: J27.1 U10.4
BO6: J27.2 U10.5
BO7: J37.1 U14.4
BO8: J37.2 U14.5
BO9: J47.1 U18.4
BO10: J47.2 U18.5
BO11: J57.1 U22.4
BO12: J57.2 U22.5
DIGITAL_1: J12.2 TP23.P$1 U5.P$14
DIGITAL_2: J13.1 TP25.P$1 U5.P$18
DIGITAL_3: J13.2 TP26.P$1 U5.P$24
DIGITAL_4: J22.2 TP39.P$1 U9.P$14
DIGITAL_5: J23.1 TP41.P$1 U9.P$18
DIGITAL_6: J23.2 TP42.P$1 U9.P$24
DIGITAL_7: J32.2 TP55.P$1 U13.P$14
DIGITAL_8: J7.2 TP7.P$1 U3.P$14
DIGITAL_9: J33.1 TP57.P$1 U13.P$18
DIGITAL_10: J33.2 TP58.P$1 U13.P$24
DIGITAL_11: J42.2 TP71.P$1 U17.P$14
DIGITAL_12: J8.1 TP9.P$1 U3.P$18
DIGITAL_13: J43.1 TP73.P$1 U17.P$18
DIGITAL_14: J8.2 TP10.P$1 U3.P$24
DIGITAL_15: J43.2 TP74.P$1 U17.P$24
DIGITAL_16: J52.2 TP87.P$1 U21.P$14
DIGITAL_17: J53.1 TP89.P$1 U21.P$18
DIGITAL_18: J53.2 TP90.P$1 U21.P$24
GND: C1.2 C2.2 C3.2 C4.2 C5.2 C6.2 C7.2 C8.2 C9.2 C10.2 C11.2 D1.C J1.GND J1.GNDBREAK J2.3 J2.5 J2.9 J3.1 J6.5 J6.6 J7.5 J7.6 J8.5 J8.6 J9.5 J9.6 J10.1 S1.3 TP2.P$1 TP16.P$1 U1.9 U1.24 U1.34 U1.EP U2.1 U2.4 U2.5 U2.PAD U3.P$35 U3.P$36 U3.P$37 U3.P$38 U3.P$39 U3.P$40 U4.6 U4.PAD
GND1: C12.2 C13.2 C14.2 C15.2 C16.2 C17.2 C18.2 C19.2 C20.2 C21.2 C22.2 D2.C J11.5 J11.6 J12.5 J12.6 J13.5 J13.6 J14.1 J15.GND J15.GNDBREAK J16.5 J16.6 J19.1 J20.3 J20.5 J20.9 S2.3 TP20.P$1 TP32.P$1 U5.P$35 U5.P$36 U5.P$37 U5.P$38 U5.P$39 U5.P$40 U6.6 U6.PAD U7.1 U7.4 U7.5 U7.PAD U8.9 U8.24 U8.34 U8.EP
GND2: C23.2 C24.2 C25.2 C26.2 C27.2 C28.2 C29.2 C30.2 C31.2 C32.2 C33.2 D3.C J21.5 J21.6 J22.5 J22.6 J23.5 J23.6 J24.1 J25.GND J25.GNDBREAK J26.5 J26.6 J29.1 J30.3 J30.5 J30.9 S3.3 TP36.P$1 TP48.P$1 U9.P$35 U9.P$36 U9.P$37 U9.P$38 U9.P$39 U9.P$40 U10.6 U10.PAD U11.1 U11.4 U11.5 U11.PAD U12.9 U12.24 U12.34 U12.EP
GND3: C34.2 C35.2 C36.2 C37.2 C38.2 C39.2 C40.2 C41.2 C42.2 C43.2 C44.2 D4.C J31.5 J31.6 J32.5 J32.6 J33.5 J33.6 J34.1 J35.GND J35.GNDBREAK J36.5 J36.6 J39.1 J40.3 J40.5 J40.9 S4.3 TP52.P$1 TP64.P$1 U13.P$35 U13.P$36 U13.P$37 U13.P$38 U13.P$39 U13.P$40 U14.6 U14.PAD U15.1 U15.4 U15.5 U15.PAD U16.9 U16.24 U16.34 U16.EP
GND4: C45.2 C46.2 C47.2 C48.2 C49.2 C50.2 C51.2 C52.2 C53.2 C54.2 C55.2 D5.C J41.5 J41.6 J42.5 J42.6 J43.5 J43.6 J44.1 J45.GND J45.GNDBREAK J46.5 J46.6 J49.1 J50.3 J50.5 J50.9 S5.3 TP68.P$1 TP80.P$1 U17.P$35 U17.P$36 U17.P$37 U17.P$38 U17.P$39 U17.P$40 U18.6 U18.PAD U19.1 U19.4 U19.5 U19.PAD U20.9 U20.24 U20.34 U20.EP
GND5: C56.2 C57.2 C58.2 C59.2 C60.2 C61.2 C62.2 C63.2 C64.2 C65.2 C66.2 D6.C J51.5 J51.6 J52.5 J52.6 J53.5 J53.6 J54.1 J55.GND J55.GNDBREAK J56.5 J56.6 J59.1 J60.3 J60.5 J60.9 S6.3 TP84.P$1 TP96.P$1 U21.P$35 U21.P$36 U21.P$37 U21.P$38 U21.P$39 U21.P$40 U22.6 U22.PAD U23.1 U23.4 U23.5 U23.PAD U24.9 U24.24 U24.34 U24.EP
N$1: C7.1 U1.31
N$2: C6.1 U1.40
N$3: C4.1 C5.1 R3.1 U1.33
N$4: L1.1 U2.7
N$5: C14.1 U8.31
N$6: C16.1 C19.1 R4.1 U8.33
N$7: C17.1 U8.40
N$8: D1.A R2.2
N$9: D2.A R6.2
N$10: L2.1 U7.7
N$11: C25.1 U12.31
N$12: C27.1 C30.1 R7.1 U12.33
N$13: C28.1 U12.40
N$14: D3.A R9.2
N$15: L3.1 U11.7
N$16: C36.1 U16.31
N$17: C38.1 C41.1 R10.1 U16.33
N$18: C39.1 U16.40
N$19: D4.A R12.2
N$20: L4.1 U15.7
N$21: C47.1 U20.31
N$22: C49.1 C52.1 R13.1 U20.33
N$23: C50.1 U20.40
N$24: D5.A R15.2
N$25: L5.1 U19.7
N$26: C58.1 U24.31
N$27: C60.1 C63.1 R16.1 U24.33
N$28: C61.1 U24.40
N$29: D6.A R18.2
N$30: L6.1 U23.7
P2.0: U1.1 U4.11
P2.1: U1.2 U4.10
P2.2: U1.3 U4.9
P2.3: U1.4 U4.8
P2.4: U1.5 U4.7
P2.5: U6.10 U8.2
P2.6: U6.9 U8.3
P2.7: U6.8 U8.4
P2.8: U6.7 U8.5
P2.9: U6.11 U8.1
P2.10: U10.10 U12.2
P2.11: U10.9 U12.3
P2.12: U10.8 U12.4
P2.13: U10.7 U12.5
P2.14: U10.11 U12.1
P2.15: U14.10 U16.2
P2.16: U14.9 U16.3
P2.17: U14.8 U16.4
P2.18: U14.7 U16.5
P2.19: U14.11 U16.1
P2.20: U18.10 U20.2
P2.21: U18.9 U20.3
P2.22: U18.8 U20.4
P2.23: U18.7 U20.5
P2.24: U18.11 U20.1
P2.25: U22.10 U24.2
P2.26: U22.9 U24.3
P2.27: U22.8 U24.4
P2.28: U22.7 U24.5
P2.29: U22.11 U24.1
P3.1: J20.2 TP17.P$1 U8.12
P3.2: J2.2 TP3.P$1 U1.12
P3.3: J2.4 TP4.P$1 U1.13
P3.4: J20.4 TP18.P$1 U8.13
P3.5: J30.2 TP33.P$1 U12.12
P3.6: J30.4 TP34.P$1 U12.13
P3.7: J40.2 TP49.P$1 U16.12
P3.8: J40.4 TP50.P$1 U16.13
P3.9: J50.2 TP65.P$1 U20.12
P3.10: J50.4 TP66.P$1 U20.13
P3.11: J60.2 TP81.P$1 U24.12
P3.12: J60.4 TP82.P$1 U24.13
SCL: J3.4 J10.4 TP13.P$1 U1.26 U3.P$33
SCL1: J14.4 J19.4 TP29.P$1 U5.P$33 U8.26
SCL2: J24.4 J29.4 TP45.P$1 U9.P$33 U12.26
SCL3: J34.4 J39.4 TP61.P$1 U13.P$33 U16.26
SCL4: J44.4 J49.4 TP77.P$1 U17.P$33 U20.26
SCL5: J54.4 J59.4 TP93.P$1 U21.P$33 U24.26
SDA: J3.3 J10.3 TP14.P$1 U1.27 U3.P$34
SDA1: J14.3 J19.3 TP30.P$1 U5.P$34 U8.27
SDA2: J24.3 J29.3 TP46.P$1 U9.P$34 U12.27
SDA3: J34.3 J39.3 TP62.P$1 U13.P$34 U16.27
SDA4: J44.3 J49.3 TP78.P$1 U17.P$34 U20.27
SDA5: J54.3 J59.3 TP94.P$1 U21.P$34 U24.27
SERVO_1: J16.2 TP28.P$1 U5.P$26
SERVO_2: J16.1 TP27.P$1 U5.P$25
SERVO_3: J26.2 TP44.P$1 U9.P$26
SERVO_4: J26.1 TP43.P$1 U9.P$25
SERVO_5: J36.2 TP60.P$1 U13.P$26
SERVO_6: J36.1 TP59.P$1 U13.P$25
SERVO_7: J46.2 TP76.P$1 U17.P$26
SERVO_8: J46.1 TP75.P$1 U17.P$25
SERVO_9: J56.2 TP92.P$1 U21.P$26
SERVO_10: J56.1 TP91.P$1 U21.P$25
SERVO_15: J9.1 TP11.P$1 U3.P$25
SERVO_16: J9.2 TP12.P$1 U3.P$26
SLED: R2.1 U1.14
SLED1: R6.1 U8.14
SLED2: R9.1 U12.14
SLED3: R12.1 U16.14
SLED4: R15.1 U20.14
SLED5: R18.1 U24.14
U2.1: S2.2 U8.6
U2.2: S3.2 U12.6
U2.3: S4.2 U16.6
U2.4: S5.2 U20.6
U2.5: S1.2 U1.6
U2.6: S6.2 U24.6
VCC: C3.1 C10.1 C11.1 J1.PWR J9.3 J9.4 U2.2 U2.3 U4.1
VCC1: C12.1 C21.1 C22.1 J15.PWR J16.3 J16.4 U6.1 U7.2 U7.3
VCC2: C23.1 C32.1 C33.1 J25.PWR J26.3 J26.4 U10.1 U11.2 U11.3
VCC3: C34.1 C43.1 C44.1 J35.PWR J36.3 J36.4 U14.1 U15.2 U15.3
VCC4: C45.1 C54.1 C55.1 J45.PWR J46.3 J46.4 U18.1 U19.2 U19.3
VCC5: C56.1 C65.1 C66.1 J55.PWR J56.3 J56.4 U22.1 U23.2 U23.3
VDDD: C1.1 C2.1 R1.1 U1.32
VDDD1: C15.1 C18.1 R5.1 U8.32
VDDD2: C26.1 C29.1 R8.1 U12.32
VDDD3: C37.1 C40.1 R11.1 U16.32
VDDD4: C48.1 C51.1 R14.1 U20.32
VDDD5: C59.1 C62.1 R17.1 U24.32